# EAGLE board EMA - Base Piso 1 v1 (EAGLE 9.7.0)
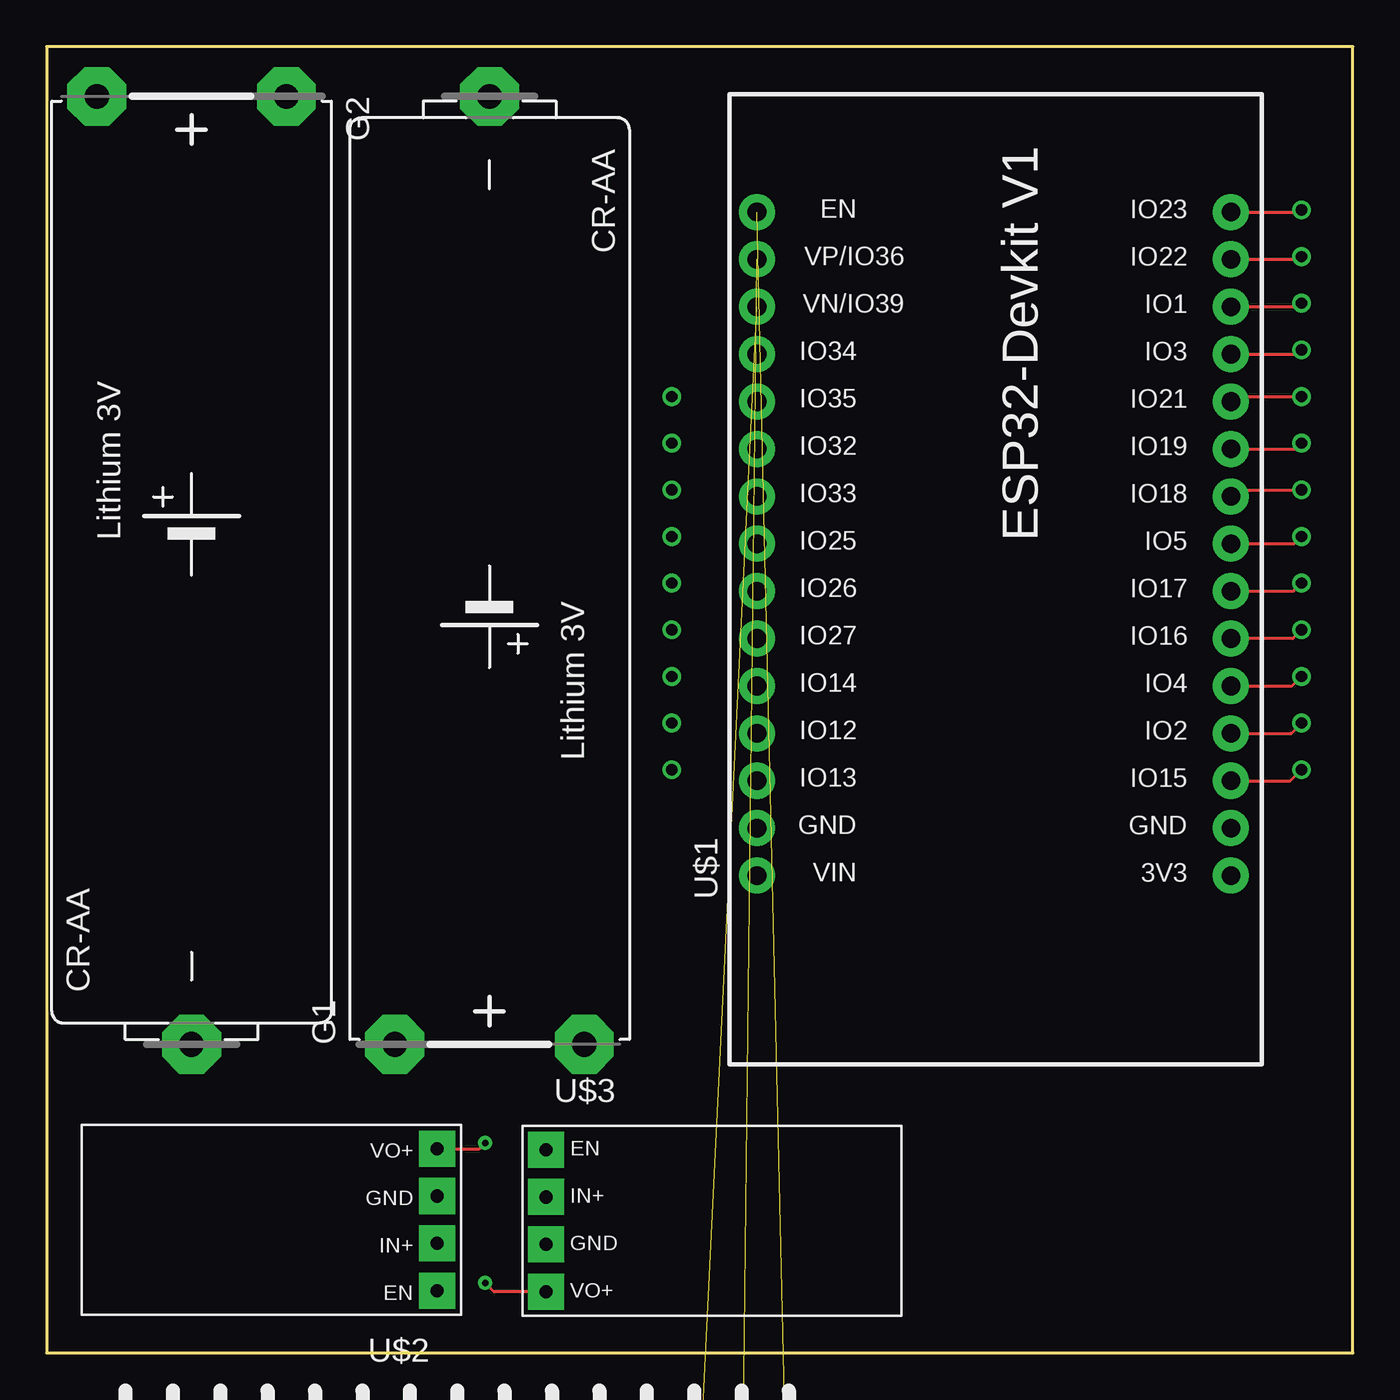
[diagram p0: board, top side]
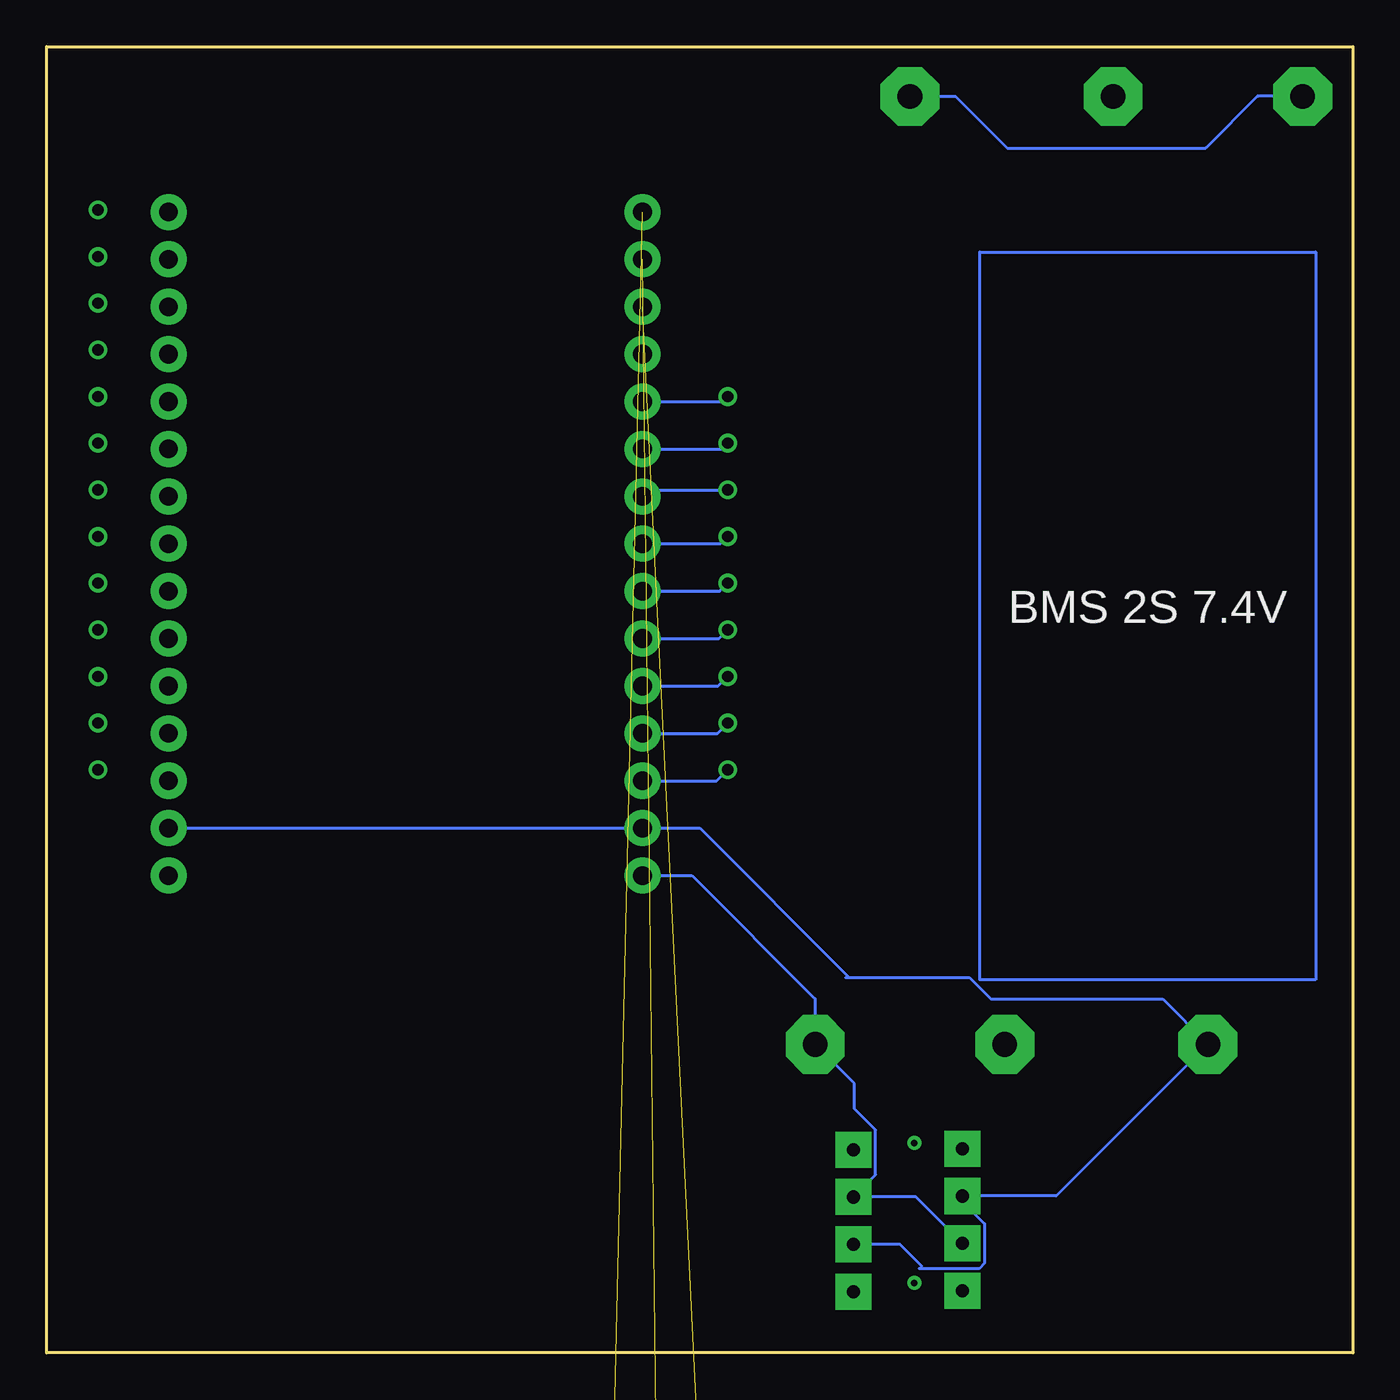
[diagram p1: board, bottom side, seen from below]

Size 70 x 70 mm. Coordinates in mm from the lower left corner, seen from the top.
Outline: 0,70 0,0 70,0 70,70 0,70
Copper layers (1*16): Top / Bottom
Stack-up Default Layer Stack: Top CuFoil:007 0.035mm / Dielectric-1 FR-4 0.2mm / Bottom CuFoil:007 0.035mm
Design rules "default": minimum track width 6mil, minimum drill 0.35mm, track to track 6mil, track to pad 6mil, pad to pad 6mil, via to via 6mil, smd to smd 6mil, copper to edge 40mil, drill to drill 6mil, minimum pad ring 10mil, minimum via ring 8mil, stop-mask expansion 4mil, vias tented up to drill 0mil, thermal gap 10mil

## Footprints (pad centres in the part's own frame; a part is rotated, then mirrored left to right if it is on the bottom)
CRAA = drill 1.321 pad 3.15 octagon: + -25.4,-5.08; +@1 -25.4,5.08; - 25.4,0
1X15/90 = drill 1.016 long: 1 -17.78,-3.81; 2 -15.24,-3.81; 3 -12.7,-3.81; 4 -10.16,-3.81; 5 -7.62,-3.81; 6 -5.08,-3.81; 7 -2.54,-3.81; 8 0,-3.81; 9 2.54,-3.81; 10 5.08,-3.81; 11 7.62,-3.81; 12 10.16,-3.81; 13 12.7,-3.81; 14 15.24,-3.81; 15 17.78,-3.81
ESP32-DEVKITV1 = drill 1 pad 1.93: 3V3 -16.52,-12.27; D1 13.96,-12.27; D2 -8.9,-12.27; D3 11.42,-12.27; D4 -6.36,-12.27; D5 1.26,-12.27; D12 -8.9,13.135; D13 -11.44,13.135; D14 -6.36,13.135; D15 -11.44,-12.27; D16 -3.82,-12.27; D17 -1.28,-12.27; D18 3.8,-12.27; D19 6.34,-12.27; D21 8.88,-12.27; D22 16.5,-12.27; D23 19.04,-12.27; D25 1.26,13.135; D26 -1.28,13.135; D27 -3.82,13.135; D32 6.34,13.135; D33 3.8,13.135; D34 11.42,13.135; D35 8.88,13.135; D36 16.5,13.135; D39 13.96,13.135; EN 19.04,13.135; GND@1 -13.98,13.135; GND@2 -13.98,-12.27; VIN -16.52,13.135
HW-613 = drill 0.7 pad 1.93 square: EN 1.27,8.89; GND 1.27,3.81; IN+ 1.27,6.35; VO+ 1.27,1.27

## Placement (x,y rotation side)
G1  CRAA  [CRAA]  23.73,41.93 90 top
G2  CRAA  [CRAA]  7.77,41.93 270 top
JP1  PINHD-1X15/90  [1X15/90]  22,-9 0 top  (outside the outline)
JP2  PINHD-1X15/90  [1X15/90]  22,-22 0 top  (outside the outline)
U$1  ESP32DEVKITV1  [ESP32-DEVKITV1]  51.2,42.1 90 top
U$2  HW-613  [HW-613]  22.2,12.21 180 top
U$3  HW-613  [HW-613]  25.5,2 0 top

## Library data of the parts
G1 G2 = battery
JP1 JP2 = Connector; CATEGORY: CONNECTOR; SUB-CATEGORY: PIN-HEADER
U$1 = ESP32-DEVKITV1
U$2 U$3 = hw-613

## Nets
+3.3V: U$3.VO+
+5V: U$2.VO+
AGND: G2.- U$1.GND@1 U$1.GND@2 U$2.GND U$3.GND
N$1: G1.- G2.+
N$2: G1.+ U$1.VIN U$2.IN+ U$3.IN+
N$3: U$1.3V3
N$4: JP1.15 U$1.EN
N$5: JP1.14 U$1.D36
N$8: U$1.D35
N$9: U$1.D32
N$10: U$1.D33
N$11: U$1.D25
N$12: U$1.D26
N$13: U$1.D27
N$14: U$1.D14
N$15: U$1.D12
N$16: U$1.D13
N$18: JP1.13 JP2.9 U$1.D39
N$31: U$1.D23
N$32: U$1.D22
N$33: U$1.D1
N$34: U$1.D3
N$35: U$1.D21
N$36: U$1.D19
N$37: U$1.D18
N$38: U$1.D5
N$39: U$1.D17
N$40: U$1.D16
N$41: U$1.D4
N$42: U$1.D2
N$43: U$1.D15

## Tracks (layer width: path | path; a pad name or v marks a point on that pad's centre or on a via)
+3.3V  (via drill 0.35)
  Top 0.152: U$3.VO+ 23.98,3.27 v23.5,3.75
+5V  (via drill 0.35)
  Top 0.152: U$2.VO+ 23.19,10.94 v23.5,11.25
AGND
  Bottom 0.152: U$1.GND@2 U$1.GND@1 35,28.12 27,20.12 | 27.17,20.12 27,20.12 | U$3.GND 24.27,5.81 23.11,4.65 23.24,4.52 20.02,4.52 19.73,4.8 19.73,6.92 20.93,8.12 U$2.GND 15.9,8.4 G2.- 10.19,18.96 19.39,18.96 20.55,20.12 27,20.12
N$1
  Bottom 0.152: G2.+ 5.11,67.33 7.88,64.56 18.53,64.56 21.3,67.33 G1.-
N$2
  Bottom 0.152: U$1.VIN 35.42,25.58 28.81,18.97 G1.+ 26.71,14.43 26.71,13.09 25.58,11.95 25.58,9.54 U$3.IN+ 23.41,8.35 U$2.IN+
N$4  (1 unrouted)
N$5  (1 unrouted)
N$8  (via drill 0.6)
  Bottom 0.152: U$1.D35 33.77,50.98 v33.5,51.25
N$9  (via drill 0.6)
  Bottom 0.152: U$1.D32 33.81,48.44 v33.5,48.75
N$10  (via drill 0.6)
  Bottom 0.152: U$1.D33 37.72,46.25 v33.5,46.25
N$11  (via drill 0.6)
  Bottom 0.152: U$1.D25 33.89,43.36 v33.5,43.75
N$12  (via drill 0.6)
  Bottom 0.152: U$1.D26 33.93,40.82 v33.5,41.25
N$13  (via drill 0.6)
  Bottom 0.152: U$1.D27 33.97,38.28 v33.5,38.75
N$14  (via drill 0.6)
  Bottom 0.152: U$1.D14 34.01,35.74 v33.5,36.25
N$15  (via drill 0.6)
  Bottom 0.152: U$1.D12 34.05,33.2 v33.5,33.75
N$16  (via drill 0.6)
  Bottom 0.152: U$1.D13 34.09,30.66 v33.5,31.25
N$17
  Bottom 0.152: 2,59 2,20 20,20 20,59 2,59
N$18  (2 unrouted)
N$31  (via drill 0.6)
  Top 0.152: U$1.D23 67.14,61.14 v67.25,61.25
N$32  (via drill 0.6)
  Top 0.152: U$1.D22 67.1,58.6 v67.25,58.75
N$33  (via drill 0.6)
  Top 0.152: U$1.D1 67.06,56.06 v67.25,56.25
N$34  (via drill 0.6)
  Top 0.152: U$1.D3 67.02,53.52 v67.25,53.75
N$35  (via drill 0.6)
  Top 0.152: U$1.D21 63.74,51.25 v67.25,51.25
N$36  (via drill 0.6)
  Top 0.152: U$1.D19 66.94,48.44 v67.25,48.75
N$37  (via drill 0.6)
  Top 0.152: U$1.D18 63.82,46.25 v67.25,46.25
N$38  (via drill 0.6)
  Top 0.152: U$1.D5 66.86,43.36 v67.25,43.75
N$39  (via drill 0.6)
  Top 0.152: U$1.D17 66.82,40.82 v67.25,41.25
N$40  (via drill 0.6)
  Top 0.152: U$1.D16 66.78,38.28 v67.25,38.75
N$41  (via drill 0.6)
  Top 0.152: U$1.D4 66.74,35.74 v67.25,36.25
N$42  (via drill 0.6)
  Top 0.152: U$1.D2 66.7,33.2 v67.25,33.75
N$43  (via drill 0.6)
  Top 0.152: U$1.D15 66.66,30.66 v67.25,31.25

## Text on the board
bPlace: BMS 2S 7.4V